# Altium PCB BUNE.PcbDoc (part 2 of 2)
Units mm, origin at the board's own origin, x right, y up, seen from the top; angles counter-clockwise.
Board outline 148 x 105 mm, 2 copper layers (Top Layer, Bottom Layer); 132 components, 91 nets, 460 pads, 94 vias.
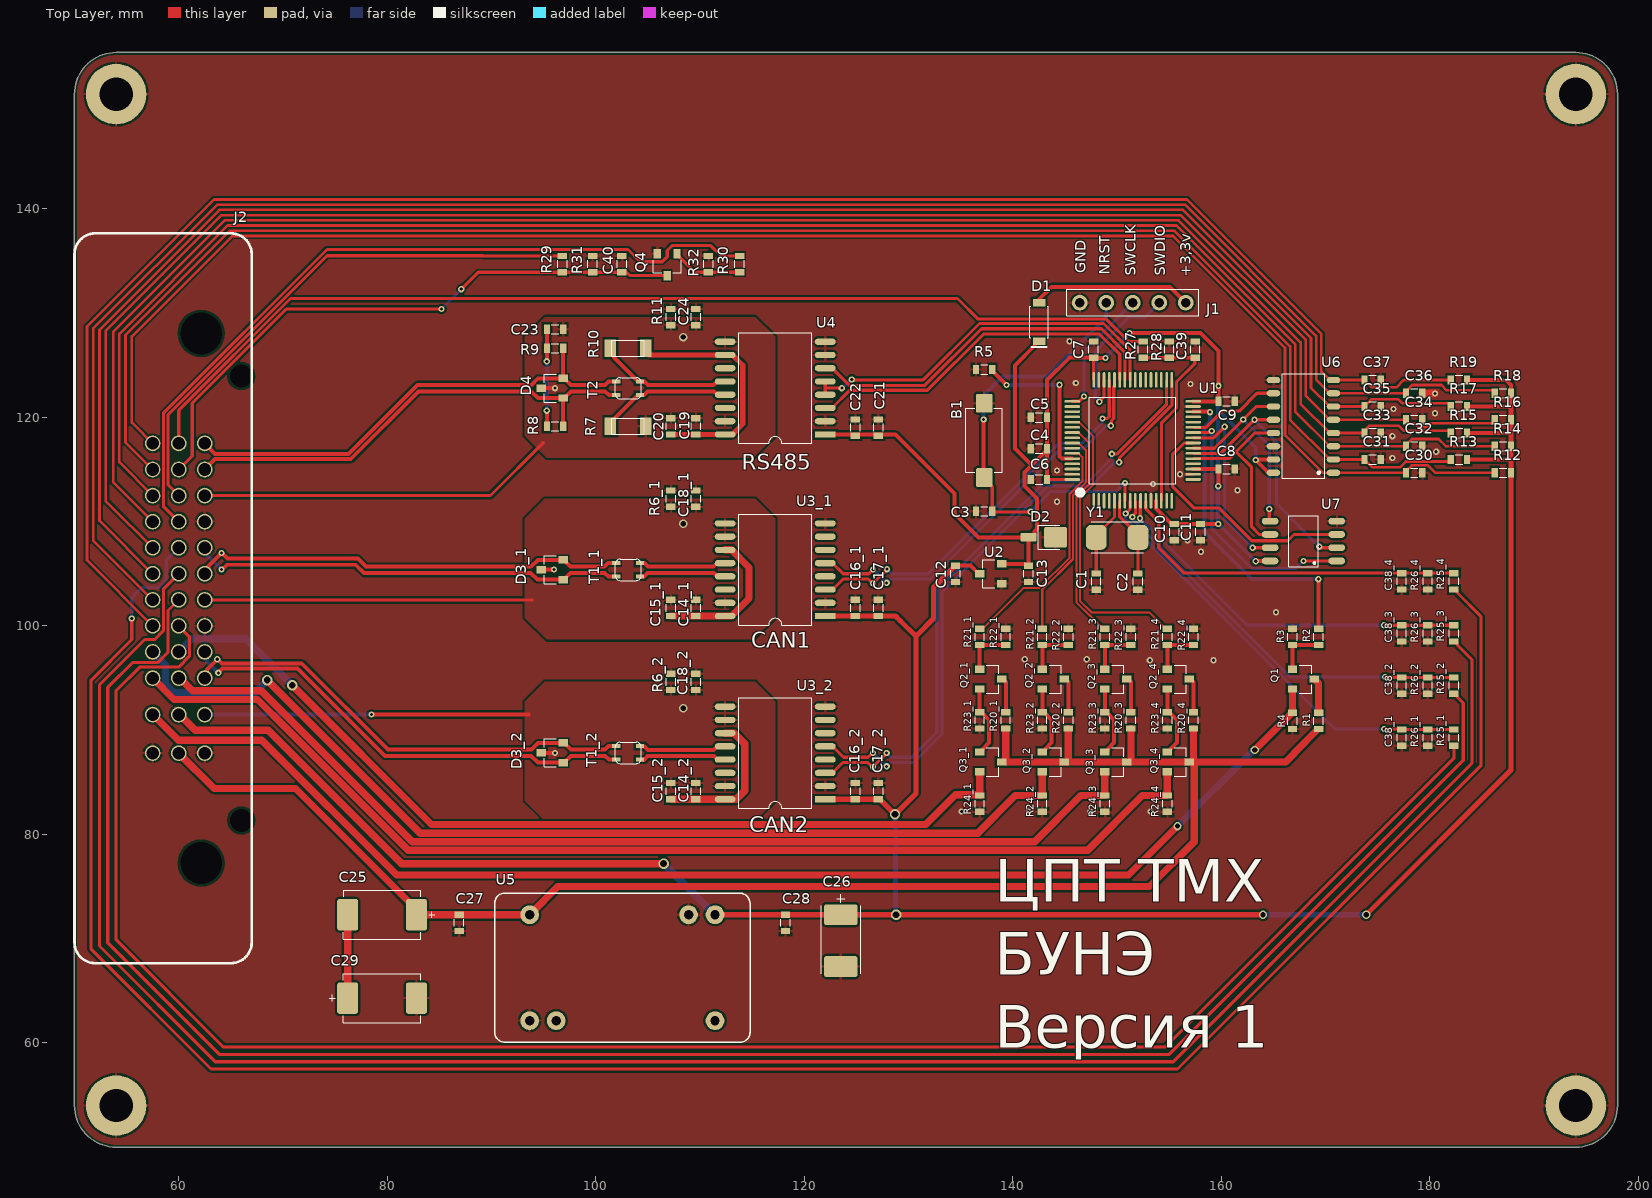
[diagram p0: Top Layer view]

## Via types
v1: diameter 0.6, hole 0.3, Top Layer to Bottom Layer, tented both sides, 82 vias
v2: diameter 0.8, hole 0.5, Top Layer to Bottom Layer, tented both sides, 7 vias
v3: diameter 1, hole 0.65, Top Layer to Bottom Layer, tented both sides, 5 vias

## Nets (pads, with @x,y where several pads share a name; then routed paths per layer and width w, separated by ;. In a path a pad name is that pad's centre, name@x,y a point inside that pad or via, vN(x,y) a via of type N, cw(c..) or ccw(c..) an arc to the next point about the centre after c; other vN are vias at no path point) (continued)
TEMP3: (continued)
  Top Layer w0.25: J2.4C 54.3,115.7 54.3,128 64.7,138.4 155.7,138.4 167.1,127 167.1,120.53 170.4,117.23 U6.3 C32.2 177.72,117.38 177.895,117.555 178.27,117.93 180.839,117.93 181.539,117.23 R14.1
TEMP4: C33.2 J2.4D R15.1 U6.4 | length 165.6
  Top Layer w0.25: J2.4D@57.809,109.691 53.704,113.796 53.704,128.204 64.4,138.9 155.9,138.9 167.6,127.2 167.6,121.3 170.4,118.5 U6.4 C33.2 173.895,118.675 173.895,118.885 174.21,119.2 177,119.2 177.5,118.7 178.716,118.7 178.721,118.695 179.839,118.695 179.844,118.7 181.825,118.7 182,118.525 R15.1
TEMP5: C34.2 J2.4E R16.1 U6.5 | length 173.1
  Top Layer w0.25: J2.4E@57.91,107.09 53,112 53,128.3 64.1,139.4 156.1,139.4 168.1,127.4 168.1,122.07 170.4,119.77 U6.5 C34.2 177.72,119.62 177.895,119.445 178.501,119.445 178.876,119.07 179.684,119.07 180.059,119.445 186.045,119.445 186.22,119.62 R16.1
TEMP6: C35.2 J2.4F R17.1 U6.6 | length 171.3
  Top Layer w0.25: J2.4F@57.555,104.945 52.4,110.1 52.4,128.4 63.9,139.9 156.3,139.9 168.6,127.6 168.6,122.84 170.4,121.04 C35.2 173.72,121.19 173.895,121.365 174.045,121.365 174.42,121.74 176.96,121.74 177.335,121.365 181.825,121.365 182,121.19 R17.1
TEMP7: C36.2 J2.4G R18.1 U6.7 | length 178.5
  Top Layer w0.25: J2.4G 51.8,108.2 51.8,128.5 63.7,140.4 156.5,140.4 169.1,127.8 169.1,123.61 170.4,122.31 U6.7 C36.2 177.895,122.485 177.895,122.695 178.3,123.1 181.1,123.1 181.6,122.6 186.045,122.6 186.22,122.425 R18.1
TEMP8: C37.2 J2.4H R19.1 U6.8 | length 177
  Top Layer w0.25: J2.4H 51.2,106.3 51.2,128.7 63.4,140.9 156.7,140.9 169.6,128 169.6,124.38 170.4,123.58 U6.8 C37.2 174.4,122.9 174.856,122.9 174.876,122.88 176.78,122.88 177.48,123.58 R19.1
Viso: C19.1 C20.1 R10.1 U4.10 U4.16 | length 23.1
  Top Layer w0.5: R10.1 104.8,126.325 105.14,125.985 U4.10 113.11,125.985 114.1,124.995 114.1,119.355 113.11,118.365 U4.16 C19.1 C20.1
Viso_1: C14_1.2 C15_1.2 U3_1.11 U3_1.16 | length 14.2
  Top Layer w0.7: C15_1.2 C14_1.2 U3_1.16 113.01,100.94 114.7,102.63 114.7,105.6 113.01,107.29 U3_1.11
Viso_2: C14_2.2 C15_2.2 U3_2.11 U3_2.16 | length 14.3
  Top Layer w0.7: C15_2.2 C14_2.2 113.465,83.365 114.3,84.2 114.3,88.7 113.285,89.715 U3_2.11
VS_Signal: J2.3A R27.2 | length 101.8
  Top Layer w0.3: J2.3A 60,120.672 70.728,131.4 134.7,131.4 136.675,129.425 148.975,129.425 151.12,127.28 R27.2
pads on no net: J2.4 J2.5 J2.6 J2.7 U1.1 U1.2 U1.3 U1.4 U1.15 U1.16 U1.17 U1.20 U1.28 U1.29 U1.35 U1.36 U1.37 U1.38 U1.39 U1.40 U1.50 U1.51 U1.52 U1.54 U1.56 U1.58 U1.61 U1.62 U3_1. U3_1.4 U3_1.6 U3_1.7 U3_1.14 U3_2. U3_2.4 U3_2.6 U3_2.7 U3_2.14 U4. U4.11 U4.14 U5.2 U5.8

## Polygon pours and split planes (outlines as drawn)
GND on Bottom Layer "GND_L02_P018" (solid, pour order 18): 50,54 50,151 cw(c54,151) 54,155 194,155 cw(c194,151) 198,151 198,54 cw(c194,54) 194,50 54,50 cw(c54,54)
GND_CAN2 on Bottom Layer "NONET_L-01_P-001" (solid, pour order 17): 117.2,83.225 117.2,92.725 115.3,94.625 95.1,94.625 93.2,92.725 93.2,83.225 95.3,81.125 115.1,81.125
GND_RS485 on Bottom Layer "NONET_L-01_P-001" (solid, pour order 12): 117.2,118.225 117.2,127.725 115.3,129.625 95.1,129.625 93.2,127.725 93.2,118.225 95.3,116.125 115.1,116.125
GND_CAN1 on Bottom Layer "NONET_L-01_P-001" (solid, pour order 16): 117.2,100.8 117.2,110.3 115.3,112.2 95.1,112.2 93.2,110.3 93.2,100.8 95.3,98.7 115.1,98.7
GND on Top Layer "GND_L01_P015" (solid, pour order 15): 50,54 50,151 cw(c54,151) 54,155 194,155 cw(c194,151) 198,151 198,54 cw(c194,54) 194,50 54,50 cw(c54,54)
GND_CAN2 on Top Layer "NONET_L-01_P-001" (solid, pour order 14): 117.2,83.225 117.2,92.725 115.3,94.625 95.1,94.625 93.2,92.725 93.2,83.225 95.3,81.125 115.1,81.125
GND_RS485 on Top Layer "NONET_L-01_P-001" (solid, pour order 11): 117.2,118.225 117.2,127.725 115.3,129.625 95.1,129.625 93.2,127.725 93.2,118.225 95.3,116.125 115.1,116.125
GND_CAN1 on Top Layer "NONET_L-01_P-001" (solid, pour order 13): 117.2,100.8 117.2,110.3 115.3,112.2 95.1,112.2 93.2,110.3 93.2,100.8 95.3,98.7 115.1,98.7

## Silkscreen, mask and mechanical layers (free items; w line width, h text height)
Top Overlay:
  text "GND" at 147,133.8 h1 r90
  text "NRST" at 149.3,133.7 h1 r90
  text "SWCLK" at 151.8,133.6 h1 r90
  text "SWDIO" at 154.6,133.6 h1 r90
  text "+3,3v" at 157.067,133.5 h1 r90
  text "RS485" at 114,115 h1.5
  text "CAN1" at 114.9,97.9 h1.5
  text "CAN2" at 114.7,80.2 h1.5
  text "ЦПТ ТМХ / БУНЭ / Версия 1" at 138.262,58.2 h7
Mechanical 1:
  the board outline again, w0.254